# EAGLE board schematic (EAGLE 9.4.2)
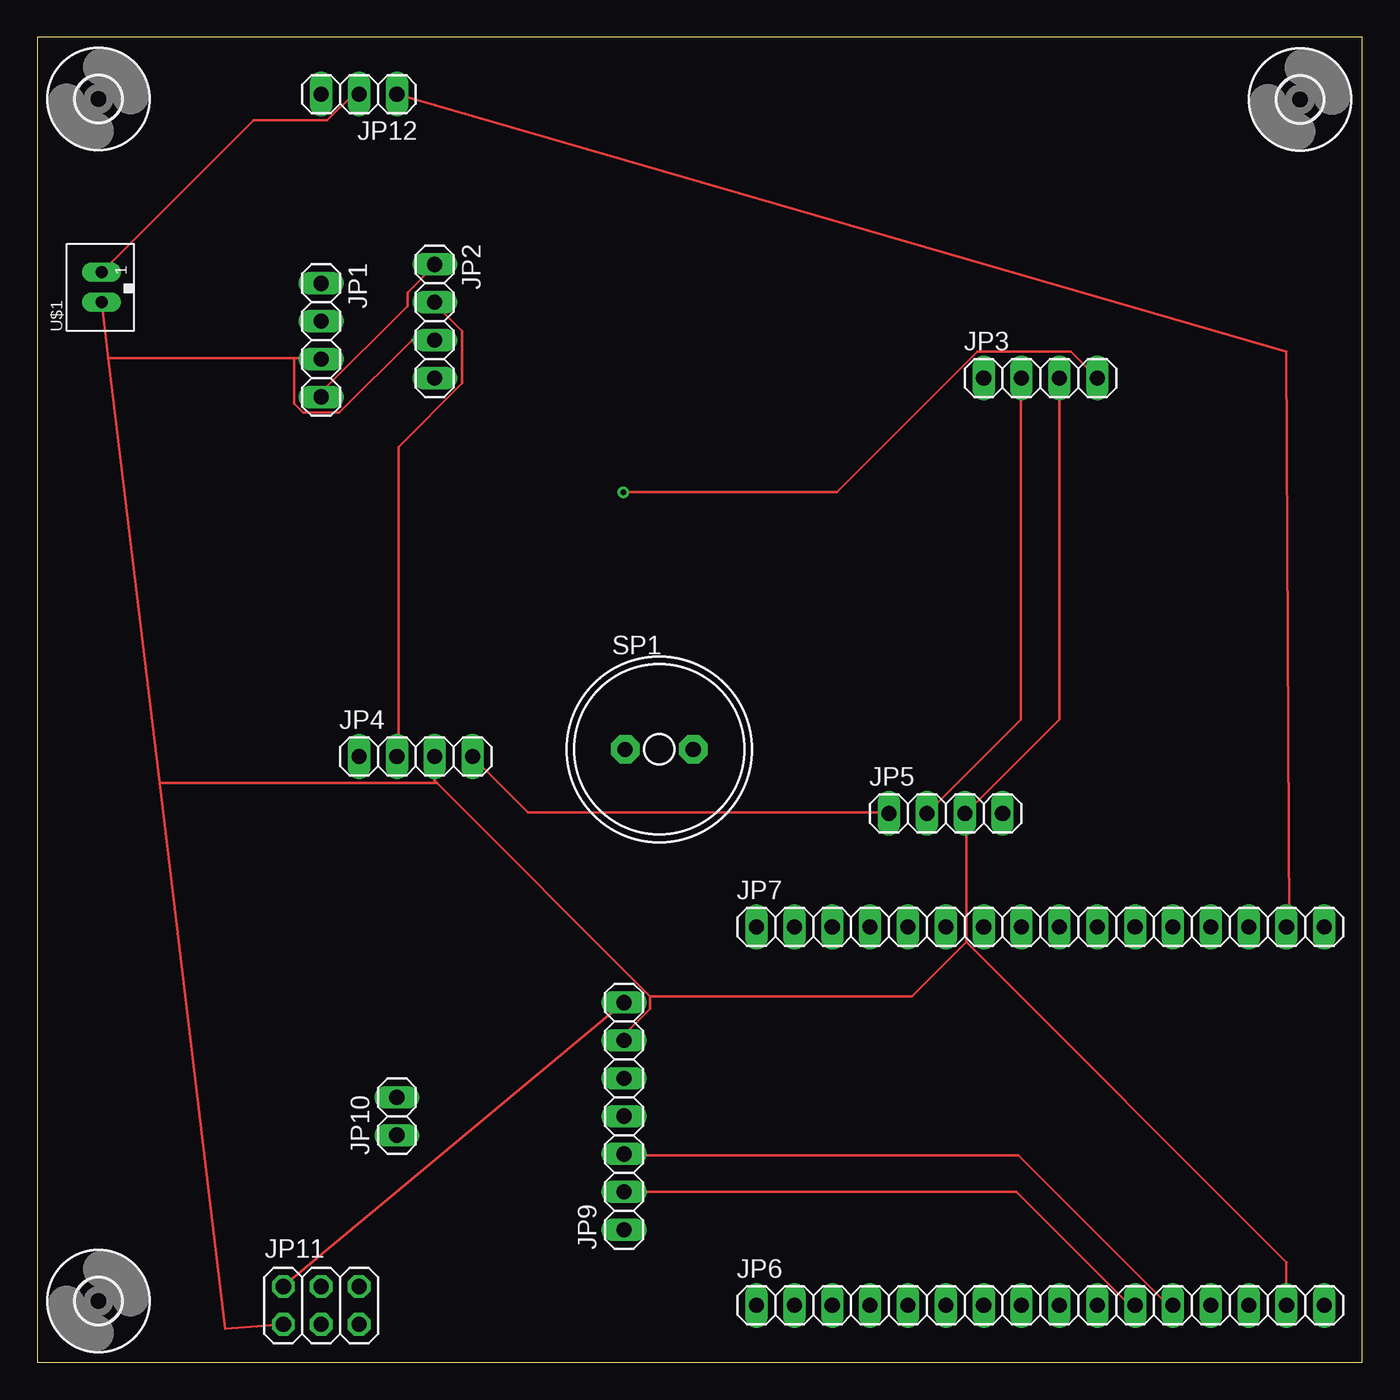
[diagram p0: board, top side]
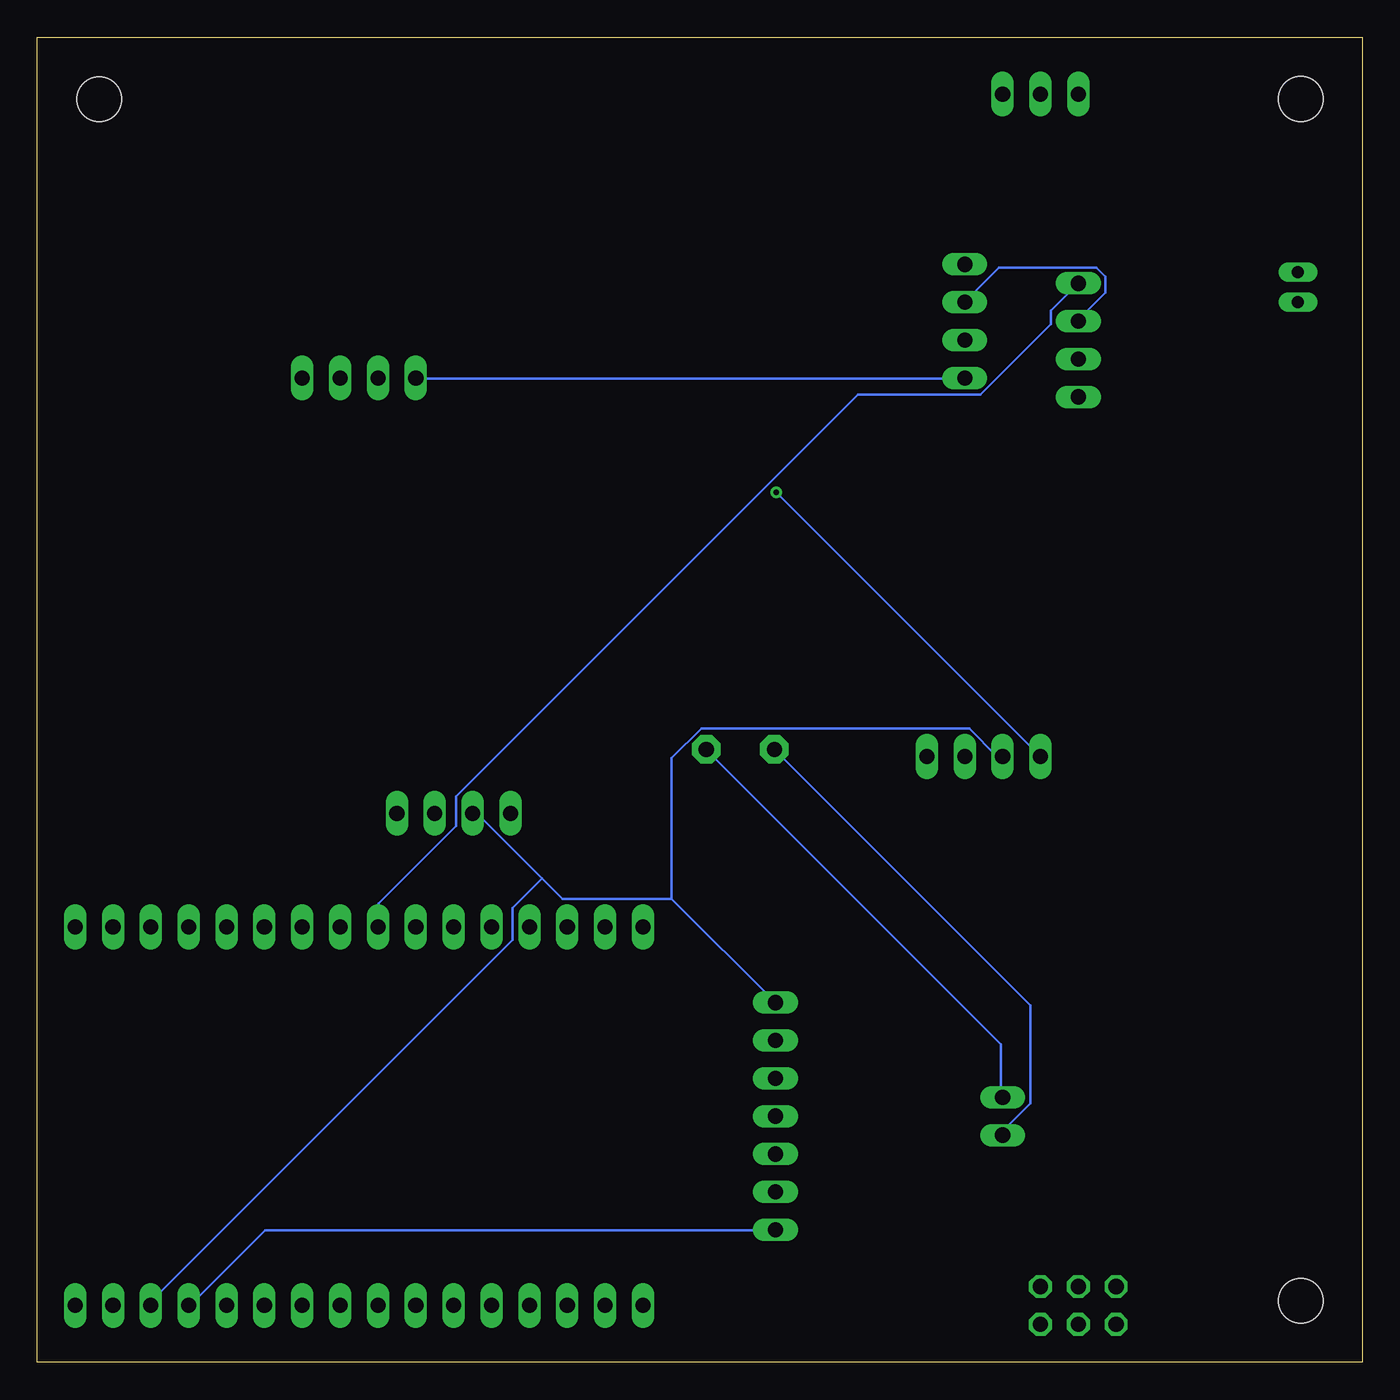
[diagram p1: board, bottom side, seen from below]

Size 88.9 x 88.9 mm. Coordinates in mm from the lower left corner, seen from the top.
Outline: 0,0 88.9,0 88.9,88.9 0,88.9 0,0
Copper layers (1*16): Top 0.035mm / dielectric 1.5mm / Bottom 0.035mm
Design rules "default": minimum track width 6mil, minimum drill 0.35mm, track to track 6mil, track to pad 6mil, pad to pad 6mil, via to via 6mil, smd to smd 6mil, copper to edge 40mil, drill to drill 6mil, minimum pad ring 10mil, minimum via ring 8mil, stop-mask expansion 4mil, vias tented up to drill 0mil, thermal gap 10mil

## Footprints (pad centres in the part's own frame; a part is rotated, then mirrored left to right if it is on the bottom)
1X04 = drill 1.016 long: 1 -3.81,0; 2 -1.27,0; 3 1.27,0; 4 3.81,0
1X16 = drill 1.016 long: 1 -19.05,0; 2 -16.51,0; 3 -13.97,0; 4 -11.43,0; 5 -8.89,0; 6 -6.35,0; 7 -3.81,0; 8 -1.27,0; 9 1.27,0; 10 3.81,0; 11 6.35,0; 12 8.89,0; 13 11.43,0; 14 13.97,0; 15 16.51,0; 16 19.05,0
1X07 = drill 1.016 long: 1 -7.62,0; 2 -5.08,0; 3 -2.54,0; 4 0,0; 5 2.54,0; 6 5.08,0; 7 7.62,0
1X02 = drill 1.016 long: 1 -1.27,0; 2 1.27,0
2X03 = drill 1.016 octagon: 1 -2.54,-1.27; 2 -2.54,1.27; 3 0,-1.27; 4 0,1.27; 5 2.54,-1.27; 6 2.54,1.27
1X03 = drill 1.016 long: 1 -2.54,0; 2 0,0; 3 2.54,0
AL11P = drill 1.016 pad 1.905 octagon: + 2.286,0; - -2.286,0
JST_B2B-PH_HEADER = drill 0.8 long: P1 1.075,0.048; P2 -0.925,0.048
3,0 = hole 3: 0,0

## Placement (x,y rotation side)
JP1  [1X04]  19.05,68.58 270 top
JP2  [1X04]  26.67,69.85 270 top
JP3  [1X04]  67.31,66.04 0 top
JP4  [1X04]  25.4,40.64 0 top
JP5  [1X04]  60.96,36.83 0 top
JP6  [1X16]  67.31,3.81 0 top
JP7  [1X16]  67.31,29.21 0 top
JP9  [1X07]  39.37,16.51 90 top
JP10  [1X02]  24.13,16.51 90 top
JP11  [2X03]  19.05,3.81 0 top
JP12  [1X03]  21.59,85.09 180 top
SP1  AL11P  [AL11P]  41.73,41.12 0 top
U$1  JST-PH_2-PIN_HEADER  [JST_B2B-PH_HEADER]  4.37,72.06 90 top
U$2  [3,0]  4.11,4.11 0 top
U$3  [3,0]  4.11,84.76 0 top
U$4  [3,0]  84.73,84.73 0 top

## Library data of the parts
JP1-JP7 JP9-JP12 = pinhead
SP1 = buzzer; OC_FARNELL: unknown; OC_NEWARK: unknown
U$1 = SRG
U$2-U$4 = holes

## Nets
+5V: JP1.2 JP2.2 JP3.2 JP4.2 JP5.2 JP6.14 JP9.7 JP11.2
GND: JP1.3 JP2.3 JP3.3 JP4.3 JP5.3 JP6.15 JP9.6 JP11.1 U$1.P2
N$1: JP10.1 SP1.-
N$2: JP10.2 SP1.+
N$3: JP6.11 JP9.2
N$4: JP2.4 JP3.1
N$5: JP3.4 JP4.1
N$6: JP4.4 JP5.1
N$7: JP12.2 U$1.P1
N$8: JP7.15 JP12.1
N$9: JP1.4 JP2.1
N$10: JP6.12 JP9.3
N$11: JP6.13 JP9.1
N$18: JP1.1 JP7.8

## Tracks (layer width: path | path; a pad name or v marks a point on that pad's centre or on a via)
+5V
  Top 0.152: JP11.2 JP9.7 | JP4.2 24.23,40.69 24.23,61.42 28.5,65.68 28.5,69.19 26.67,71.02 JP2.2 | JP5.2 65.99,43.13 65.99,65.99 JP3.2
  Bottom 0.152: JP1.2 19.05,69.95 17.22,71.78 17.22,72.85 17.83,73.46 24.38,73.46 26.67,71.17 JP2.2 | 55.02,32.46 53.65,31.09 46.33,31.09 | 55.02,32.46 59.28,36.73 59.59,36.73 JP5.2 | JP9.7 46.33,31.09 | 55.02,32.46 57,30.48 57,28.35 81.23,4.12 81.23,3.81 JP6.14 | 46.33,31.09 46.33,40.54 44.35,42.52 26.36,42.52 24.54,40.69 24.23,40.69 JP4.2
GND
  Top 0.152: U$1.P2 4.78,67.37 | 4.78,67.37 8.21,38.86 | 8.21,38.86 12.62,2.26 JP11.1 | 41.12,24.54 41.12,23.72 39.37,21.97 JP9.6 | 41.12,24.54 26.81,38.85 | JP4.3 26.67,38.99 26.81,38.85 | 17.22,67.36 4.72,67.36 4.78,67.37 | 17.22,67.36 19.05,67.36 JP1.3 | JP2.3 25.15,68.58 20.27,63.7 17.83,63.7 17.22,64.31 17.22,67.36 | 8.21,38.86 8.23,38.86 26.82,38.86 26.81,38.85 | JP6.15 83.82,6.71 62.33,28.19 | 62.33,28.19 62.33,36.73 JP5.3 62.33,36.88 68.58,43.13 JP3.3 | 41.12,24.54 58.67,24.54 62.33,28.19
N$1
  Bottom 0.152: SP1.- 22.25,23.93 22.25,17.37 24.08,15.54 24.08,15.24 JP10.1
N$2
  Bottom 0.152: SP1.+ 24.23,21.34 24.23,17.83 JP10.2
N$3
  Top 0.152: JP6.11 73.3,3.81 65.68,11.43 JP9.2
N$4
  Bottom 0.152: JP2.4 26.67,65.99 63.4,65.99 JP3.1
N$5  (via drill 0.35)
  Top 0.152: v39.32,58.37 53.65,58.37 63.09,67.82 69.34,67.82 JP3.4
  Bottom 0.152: v39.32,58.37 JP4.1
N$6
  Top 0.152: JP5.1 57.15,36.88 32.92,36.88 29.26,40.54 JP4.4
N$7
  Top 0.152: U$1.P1 14.52,83.34 19.46,83.34 21.21,85.09 JP12.2
N$8
  Top 0.152: JP12.1 83.8,67.79 84.02,29.26 | 84.02,29.26 84.02,28.65 | JP7.15 83.82,29.26 83.97,29.26 84.02,29.26
N$9
  Top 0.152: JP1.4 19.05,65.08 24.84,70.87 24.84,71.78 26.67,73.61 JP2.1
N$10
  Top 0.152: JP6.12 75.89,3.81 65.84,13.87 39.47,13.87 JP9.3
N$11
  Bottom 0.152: JP6.13 78.64,3.81 73.61,8.84 39.47,8.84 JP9.1
N$18
  Bottom 0.152: JP1.1 20.88,70.56 20.88,69.65 25.6,64.92 33.83,64.92 60.81,37.95 60.81,35.97 65.99,30.79 65.99,29.26 JP7.8